# Altium PCB AX309.REV.1.0.PcbDoc (part 7 of 10)
Units mil, origin at the board's own origin, x right, y up, seen from the top; angles counter-clockwise.
Board outline 5185 x 3614 mil, 4 copper layers (Top Layer, GND, Mid-Layer 1, Bottom Layer); 191 components, 352 nets, 1106 pads, 425 vias.
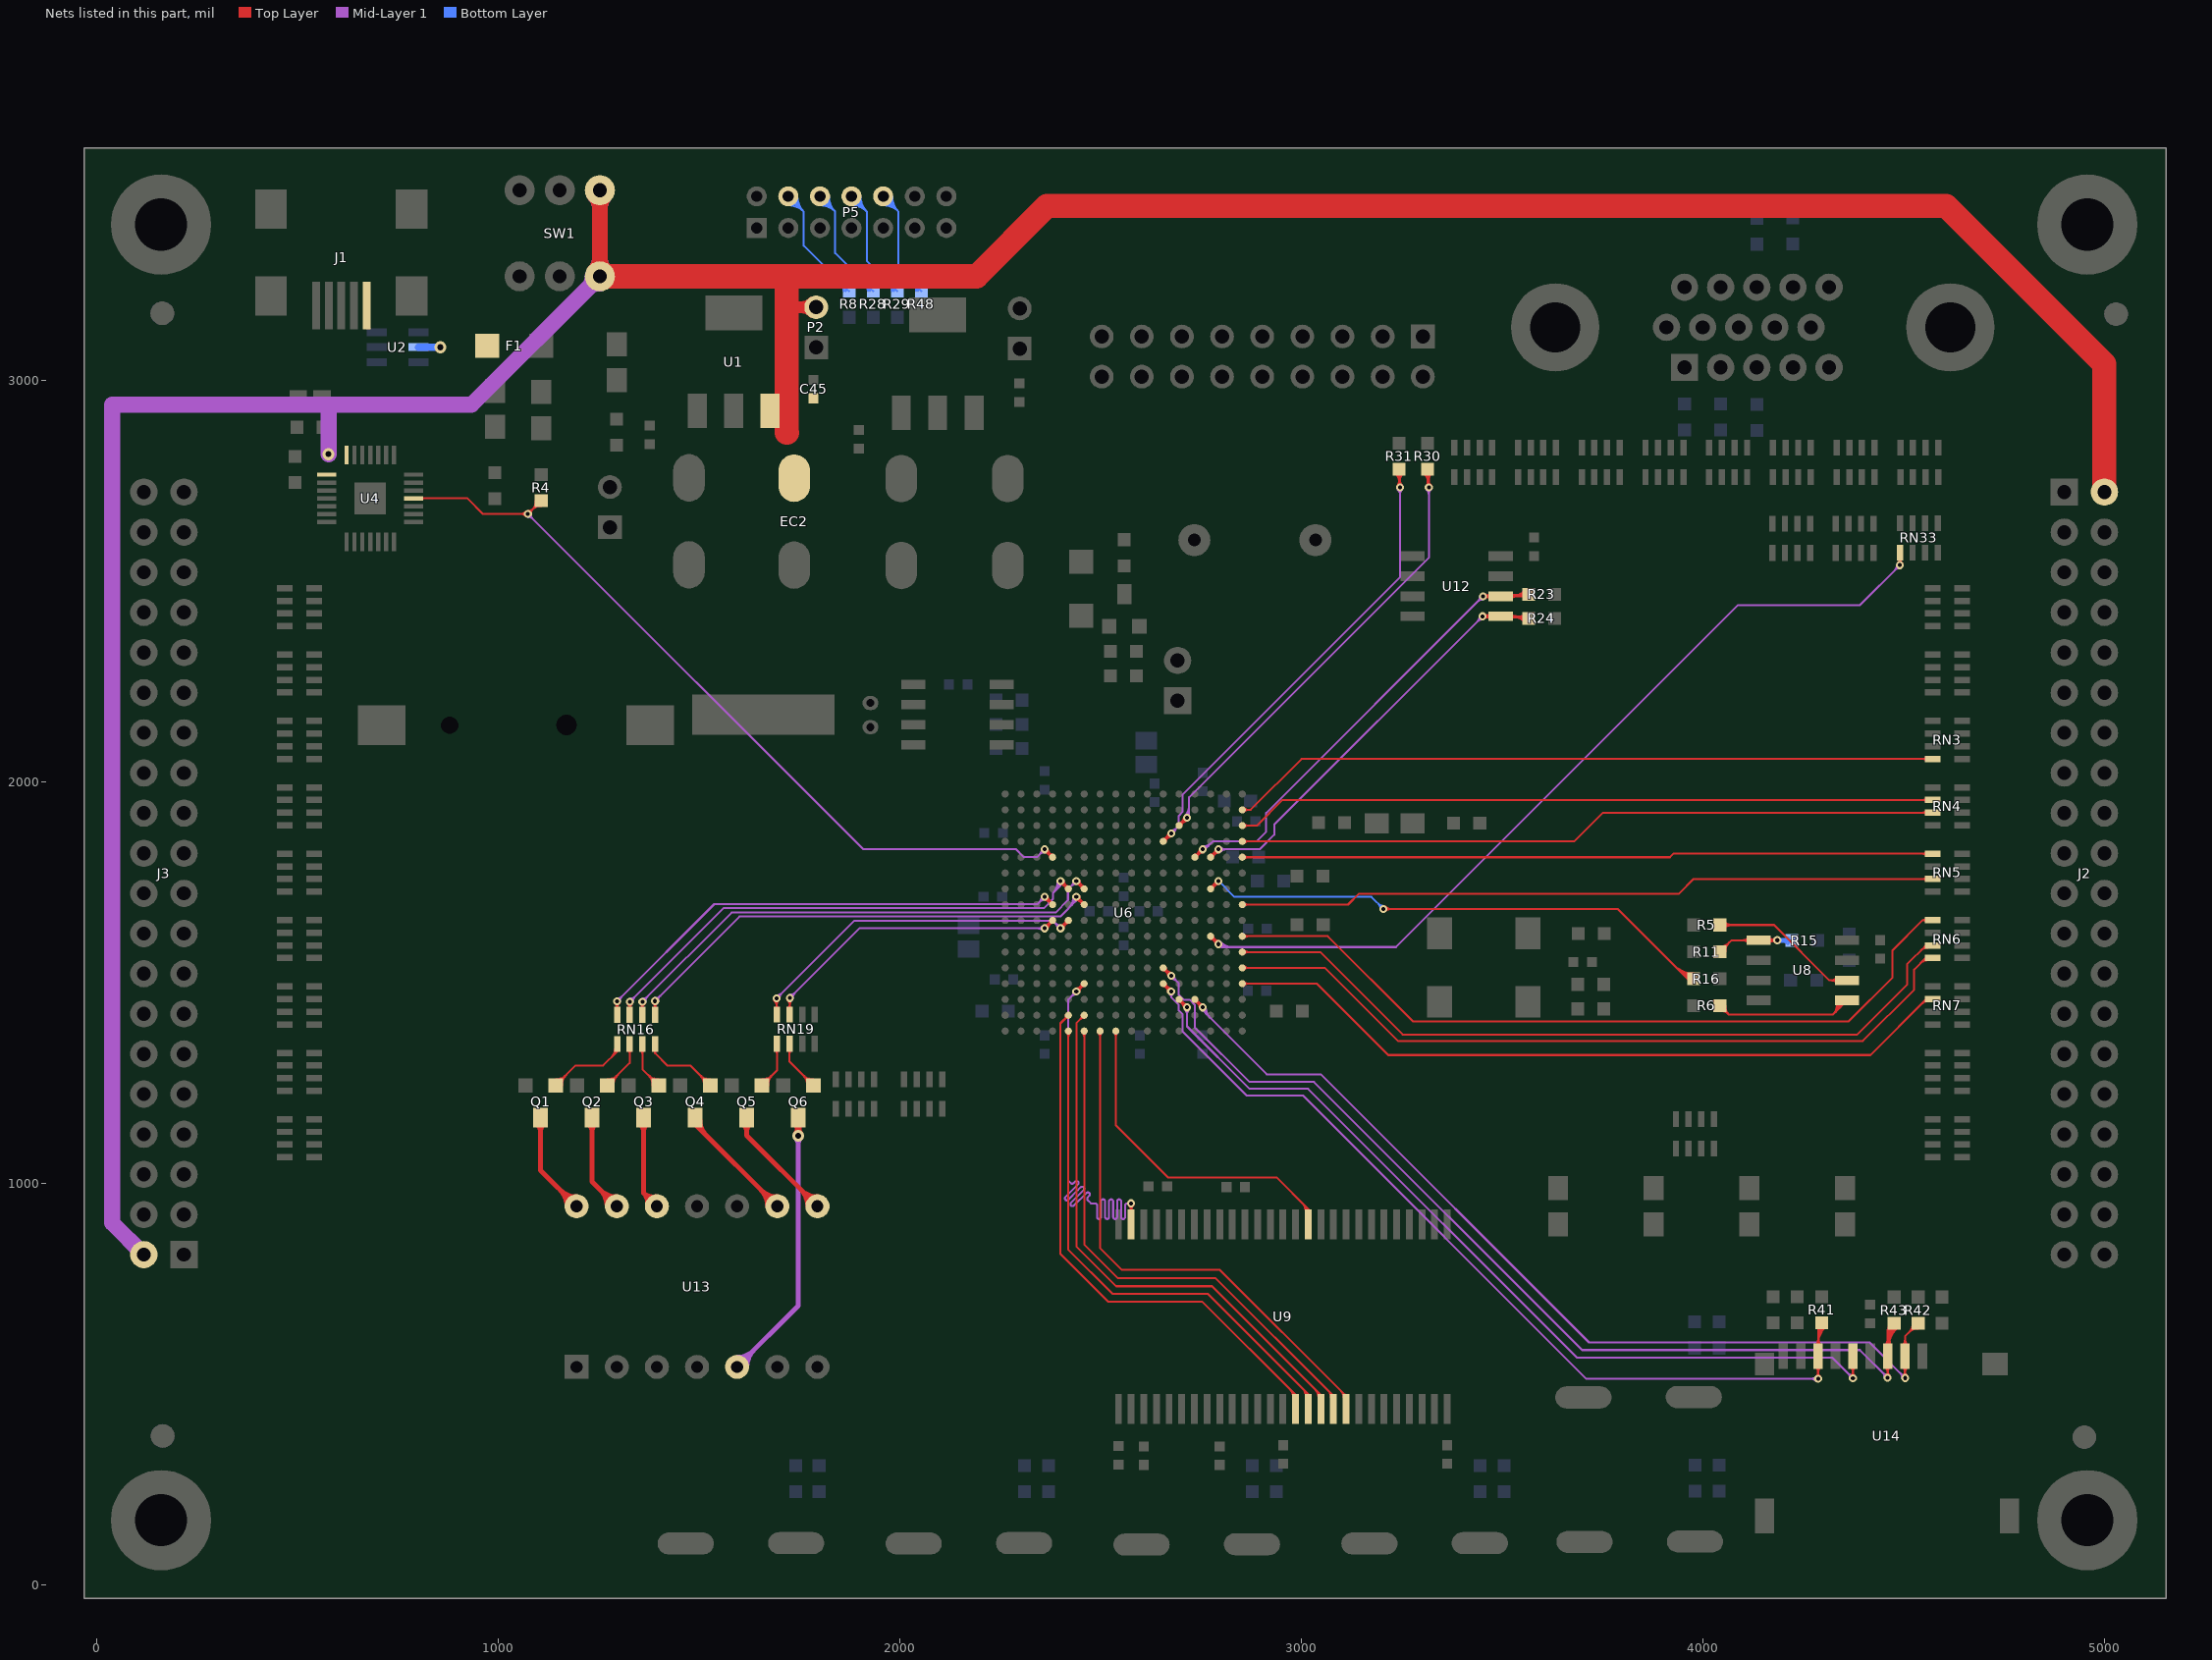
[diagram p9: the nets of this part, all layers, seen from the top]

## Via types
v1: diameter 20, hole 10, Top Layer to Bottom Layer, 328 vias
v2: diameter 30, hole 15, Top Layer to Bottom Layer, 95 vias
v3: diameter 40, hole 20, Top Layer to Bottom Layer, 2 vias

## Nets (pads, with @x,y where several pads share a name; then routed paths per layer and width w, separated by ;. In a path a pad name is that pad's centre, name@x,y a point inside that pad or via, vN(x,y) a via of type N, cw(c..) or ccw(c..) an arc to the next point about the centre after c; other vN are vias at no path point) (continued)
S_DB15: U6.F4 U9.53 | length 1558.9
  Top Layer w5: v1@2438.88,1484.58 ccw(c2436.17,1504.56) U6.F4@2453.63,1494.48 ; v1@2439.55,1479.63 ccw(c2437.9,1491.79) 2448.53,1485.65 ; v1(2439.89,1477.15) U6.F4@2459.57,1496.83 ; v1@2439.89,1484.65 ccw(c2439.89,1502.76) 2452.69,1489.95 ccw(c2465.5,1477.15) v1@2447.39,1477.15 ; v1@2442.37,1476.81 cw(c2454.53,1475.16) 2448.39,1485.79 ; v1@2447.32,1476.14 cw(c2467.3,1473.43) U6.F4@2457.22,1490.89 ; 2449.65,1487.6 cw(c2443.67,1491.05) v1@2441.86,1484.39 ; 2450.34,1486.91 ccw(c2453.79,1480.93) v1@2447.13,1479.12 ; U6.F4@2453.22,1496.83 cw(c2437.87,1496.83) 2448.72,1485.98 cw(c2459.57,1475.13) U6.F4@2459.57,1490.48 ; v1@2571.19,944.2 cw(c2558.39,931.4) 2576.5,931.4 cw(c2594.6,931.4) v1@2581.8,944.2 ; U9.53@2572.25,930.24 ccw(c2562.01,940.49) 2576.5,940.49 ccw(c2590.98,940.49) U9.53@2580.74,930.24 ; v1@2572.86,942.94 cw(c2568.3,934.71) 2577.39,937.15 cw(c2582.16,938.43) v1@2579.91,942.83 ; v1@2573.08,942.83 cw(c2570.83,938.43) 2575.6,937.15 cw(c2584.69,934.71) v1@2580.13,942.94 ; U9.53@2576.5,897 v1(2576.5,949.5) ; v1@2441.83,1484.39 ccw(c2443.66,1491.22) 2447.19,1485.1 cw(c2443.66,1491.22) v1@2441.83,1484.39 ; v1@2447.13,1479.09 cw(c2453.96,1480.92) 2447.84,1484.45 ccw(c2453.96,1480.92) v1@2447.13,1479.09
  Mid-Layer 1 w5: v1@2432.39,1477.15 cw(c2414.28,1477.15) 2427.09,1464.35 cw(c2439.89,1451.54) v1@2439.89,1469.65 ; v1(2439.89,1477.15) 2420.2,1457.46 2420.2,1005.8 2426,1000 ccw(c2429.54,1003.54) 2433.07,1000 2436.74,1003.67 cw(c2440.28,1000.13) 2443.81,1003.67 cw(c2440.28,1000.13) 2443.81,996.6 2412.67,965.46 ccw(c2416.21,961.92) 2412.67,958.39 ccw(c2416.21,961.92) 2419.74,958.39 2443.68,982.32 2450.88,989.53 cw(c2454.42,985.99) 2457.95,989.53 cw(c2454.42,985.99) 2457.95,982.46 2450.75,975.25 2426.69,951.19 ccw(c2430.22,947.66) 2426.69,944.12 ccw(c2430.22,947.66) 2433.76,944.12 2465.03,975.39 cw(c2468.56,971.85) 2472.1,975.39 cw(c2468.56,971.85) 2472.1,968.32 2468.43,964.64 ccw(c2471.96,961.11) 2468.43,957.57 2476.5,949.5 2486.5,949.5 cw(c2486.5,944.5) 2491.5,944.5 2491.5,915.48 ccw(c2496.5,915.48) 2496.5,910.48 ccw(c2496.5,915.48) 2501.5,915.48 2501.5,954.53 cw(c2506.5,954.53) 2506.5,959.53 cw(c2506.5,954.53) 2511.5,954.53 2511.5,915.48 ccw(c2516.5,915.48) 2516.5,910.48 ccw(c2516.5,915.48) 2521.5,915.48 2521.5,954.53 cw(c2526.5,954.53) 2526.5,959.53 cw(c2526.5,954.53) 2531.5,954.53 2531.5,915.48 ccw(c2536.5,915.48) 2536.5,910.48 ccw(c2536.5,915.48) 2541.5,915.48 2541.5,954.53 cw(c2546.5,954.53) 2546.5,959.53 cw(c2546.5,954.53) 2551.5,954.53 2551.5,915.48 ccw(c2556.5,915.48) 2556.5,910.48 ccw(c2556.5,915.48) 2561.5,915.48 2561.5,944.5 cw(c2566.5,944.5) 2566.5,949.5 v1(2576.5,949.5)
S_DQM0: U6.E2 U9.15 | length 1429.6
  Top Layer w5: U6.E2@2413.85,1418.09 cw(c2398.5,1418.09) 2409.35,1407.24 cw(c2420.2,1396.39) U6.E2@2420.2,1411.74 ; U6.E2@2420.2,1418.09 2400,1397.89 2400,824 2520,704 2754,704 2985.94,472.06 U9.15@2985.94,437 ; 2971.42,486.58 cw(c2950.84,466) U9.15@2979.94,466 ; 2979.96,478.04 cw(c2967.91,466) U9.15@2984.94,466
S_DQM1: U6.H1 U9.39 | length 933.5
  Top Layer w5: U6.H1@2533.82,1374.23 cw(c2522.96,1363.37) 2538.32,1363.37 cw(c2553.67,1363.37) U6.H1@2542.81,1374.23 ; U6.H1@2538.32,1378.72 2538.32,1143.68 2668,1014 2939,1014 3017.44,935.56 ; 3000.44,952.56 cw(c2973.88,926) U9.39@3011.44,926 ; 3008.97,944.03 cw(c2990.95,926) U9.39@3016.44,926 ; U9.39@3014.83,931.4 ccw(c3012.83,935.56) 3017.44,935.56 ; U9.39@3017.44,897 3017.44,935.56 ; 3017.51,935.49 cw(c3008.02,926) U9.39@3021.44,926 ; U9.39@3020.05,931.4 cw(c3022.06,935.56) 3017.44,935.56
S_NCAS: U6.F2 U9.17 | length 1441.8
  Top Layer w5: U6.F2@2453.22,1418.09 cw(c2437.87,1418.09) 2448.72,1407.24 cw(c2459.57,1396.39) U6.F2@2459.57,1411.74 ; U6.F2@2459.57,1418.09 2440,1398.52 2440,842 2539,743 2778,743 3048.94,472.06 U9.17@3048.94,437 ; 3034.41,486.59 cw(c3013.81,466) U9.17@3042.94,466 ; 3042.94,478.06 cw(c3030.89,466) U9.17@3047.94,466
S_NCS: U6.G1 U9.19 | length 1385.4
  Top Layer w5: U6.G1@2494.45,1374.23 cw(c2483.59,1363.37) 2498.94,1363.37 cw(c2514.3,1363.37) U6.G1@2503.44,1374.23 ; U6.G1@2498.94,1378.72 2498.94,838.06 2553.5,783.5 2797.5,783.5 U9.19@3111,470 ; 3099.52,481.49 cw(c3084.03,466) U9.19@3105.93,466 ; U9.19@3106.93,474.07 ccw(c3111.93,479.07) U9.19@3111.93,472 ; U9.19@3111,437.93 U9.19@3111,470 ; U9.19@3111.93,469.07 U9.19@3111,470
S_NRAS: U6.F1 U9.18 | length 1394.7
  Top Layer w5: U6.F1@2455.08,1374.23 cw(c2444.22,1363.37) 2459.57,1363.37 cw(c2474.92,1363.37) U6.F1@2464.07,1374.23 ; U6.F1@2459.57,1378.72 2459.57,847.43 2544,763 2787,763 3079,471 U9.18@3079,438.43 ; 3067.67,482.33 cw(c3051.34,466) U9.18@3074.43,466 ; U9.18@3076.2,473.8 cw(c3068.41,466) U9.18@3079.43,466 ; U9.18@3076.28,473.72 ccw(c3080.43,477.87) U9.18@3080.43,472
S_NWE: U6.E1 U9.16 | length 1406
  Top Layer w5: U6.E1@2415.71,1374.23 cw(c2404.85,1363.37) 2420.2,1363.37 cw(c2435.55,1363.37) U6.E1@2424.7,1374.23 ; U6.E1@2420.2,1378.72 2420.2,833.8 2530,724 2768,724 3017.44,474.56 ; 3001.15,490.85 cw(c2976.29,466) U9.16@3011.44,466 ; 3009.68,482.32 cw(c2993.36,466) U9.16@3016.44,466 ; U9.16@3015.39,471.64 ccw(c3014.34,474.56) 3017.44,474.56 ; U9.16@3017.44,437 3017.44,474.56 ; U9.16@3019.49,471.64 cw(c3020.55,474.56) 3017.44,474.56
SCL: R23.2 U6.N12 U12.6 | length 1627.9
  Top Layer w5: U6.N12@2735.17,1811.8 v1(2754.85,1831.48) ; U6.N12@2735.17,1818.15 ccw(c2735.17,1833.5) 2746.02,1822.65 ccw(c2756.87,1811.8) U6.N12@2741.52,1811.8 ; U6.N12@2737.52,1817.74 ccw(c2727.44,1835.2) v1@2747.42,1832.49 ; U6.N12@2741.11,1814.15 cw(c2758.57,1804.07) v1@2755.86,1824.05 ; 2744.4,1821.72 ccw(c2740.95,1827.7) v1@2747.61,1829.51 ; 2745.09,1821.03 cw(c2751.07,1817.58) v1@2752.88,1824.24 ; 2746.21,1822.98 cw(c2756.84,1816.84) v1@2755.19,1829 ; 2746.35,1822.84 ccw(c2740.21,1833.47) v1@2752.37,1831.82 ; v1@2747.35,1831.48 cw(c2729.24,1831.48) 2742.05,1818.68 cw(c2754.85,1805.87) v1@2754.85,1823.98 ; v1(3453,2462) U12.6@3497,2462 R23.2@3567,2462 ; v1@3458.3,2456.7 cw(c3471.11,2443.89) 3471.11,2462 cw(c3471.11,2480.11) v1@3458.3,2467.3 ; v1@3458.6,2457.01 cw(c3464.25,2451.97) 3466.2,2459.28 cw(c3468.63,2468.32) v1@3459.95,2464.81 ; v1@3458.6,2466.99 ccw(c3464.25,2472.03) 3466.2,2464.72 ccw(c3468.63,2455.68) v1@3459.95,2459.19 ; U12.6@3472.28,2455.28 ccw(c3456.06,2439.07) 3456.06,2462 ccw(c3456.06,2484.93) U12.6@3472.28,2468.72 ; U12.6@3517.82,2465.51 ccw(c3525.37,2474.93) 3527.76,2463.1 ; U12.6@3520.94,2469.41 ccw(c3534.08,2485.79) 3538.23,2465.21 ; U12.6@3521.72,2455.28 cw(c3537.94,2439.07) 3537.94,2462 cw(c3537.94,2484.93) U12.6@3521.72,2468.72 ; U12.6@3522.34,2462 ccw(c3522.34,2511.66) R23.2@3557.45,2476.55 ; U12.6@3522.91,2456.75 cw(c3537.89,2446.8) 3534.33,2464.42 ; 3534.41,2462 ccw(c3534.41,2499.59) R23.2@3560.99,2473.01 ; R23.2@3557.45,2457.45 ccw(c3546.48,2446.48) 3546.48,2462 ccw(c3546.48,2487.52) R23.2@3564.53,2469.47 ; v1@2752.91,1824.24 ccw(c2751.08,1817.41) 2747.55,1823.53 cw(c2751.08,1817.41) v1@2752.91,1824.24 ; 2746.9,1824.18 ccw(c2740.78,1827.71) 2747.61,1829.54 cw(c2740.78,1827.71) 2746.9,1824.18
  Mid-Layer 1 w5: v1(2754.85,1831.48) 2760.48,1831.48 2781,1852 2890,1852 2913,1875 2913,1922 v1(3453,2462) ; v1@2754.85,1833.98 ccw(c2754.85,1853.61) 2768.73,1839.73 ; v1@2754.85,1838.98 ccw(c2754.85,1870.68) 2777.27,1848.27 ; v1@3445.5,2462 cw(c3427.39,2462) 3440.2,2449.2 cw(c3453,2436.39) v1@3453,2454.5
SD_CLK: U6.M3 U14.5 | length 2425.1
  Top Layer w5: U6.M3@2695.8,1451.11 cw(c2695.8,1435.76) 2706.65,1446.61 cw(c2717.5,1457.46) U6.M3@2702.15,1457.46 ; U6.M3@2695.8,1457.46 v1(2715.48,1437.78) ; U6.M3@2698.15,1451.52 cw(c2688.07,1434.06) v1@2708.05,1436.77 ; U6.M3@2701.74,1455.11 ccw(c2719.2,1465.19) v1@2716.49,1445.21 ; 2705.03,1447.54 cw(c2701.58,1441.56) v1@2708.24,1439.75 ; 2705.72,1448.23 ccw(c2711.7,1451.68) v1@2713.51,1445.02 ; 2706.84,1446.28 ccw(c2717.47,1452.42) v1@2715.82,1440.26 ; 2706.98,1446.42 cw(c2700.84,1435.79) v1@2713,1437.44 ; v1@2707.98,1437.78 ccw(c2689.87,1437.78) 2702.68,1450.58 ccw(c2715.48,1463.39) v1@2715.48,1445.28 ; U14.5@4367.77,542.55 cw(c4351.88,526.66) 4374.35,526.66 cw(c4396.83,526.66) U14.5@4380.94,542.55 ; v1@4369.05,518.95 ccw(c4356.25,531.75) 4374.35,531.75 ccw(c4392.46,531.75) v1@4379.66,518.95 ; v1(4374.35,513.65) U14.5@4374.35,568.82 ; 2707.53,1445.08 cw(c2701.41,1441.55) 2708.24,1439.72 ccw(c2701.41,1441.55) 2707.53,1445.08 ; 2708.18,1445.73 ccw(c2711.71,1451.85) 2713.54,1445.02 cw(c2711.71,1451.85) 2708.18,1445.73
  Mid-Layer 1 w5: v1@2710.18,1432.48 cw(c2697.37,1419.67) 2715.48,1419.67 cw(c2733.59,1419.67) v1@2720.78,1432.48 ; v1(2715.48,1437.78) 2715.48,1390.52 2871,1235 3017,1235 3687,565 4323,565 v1(4374.35,513.65) ; v1@4366.85,513.65 ccw(c4348.75,513.65) 4361.55,526.45 ccw(c4374.35,539.25) v1@4374.35,521.15
SD_DIN: R43.2 U6.L5 U14.3 | length 3086.1
  Top Layer w5: U6.L5@2656.43,1529.85 cw(c2656.43,1514.5) 2667.28,1525.35 cw(c2678.13,1536.2) U6.L5@2662.78,1536.2 ; U6.L5@2656.43,1536.2 v1(2676.11,1516.52) ; U6.L5@2658.78,1530.26 cw(c2648.7,1512.8) v1@2668.68,1515.51 ; U6.L5@2662.37,1533.85 ccw(c2679.83,1543.93) v1@2677.12,1523.95 ; 2665.66,1526.28 cw(c2662.21,1520.3) v1@2668.87,1518.49 ; 2666.35,1526.97 ccw(c2672.33,1530.42) v1@2674.14,1523.76 ; 2667.47,1525.02 ccw(c2678.1,1531.16) v1@2676.45,1519 ; 2667.61,1525.16 cw(c2661.47,1514.53) v1@2673.63,1516.18 ; v1@2668.61,1516.52 ccw(c2650.5,1516.52) 2663.31,1529.32 ccw(c2676.11,1542.13) v1@2676.11,1524.02 ; U14.3@4454.39,542.55 cw(c4438.49,526.66) 4460.97,526.66 cw(c4483.45,526.66) U14.3@4467.55,542.55 ; U14.3@4454.39,595.09 ccw(c4438.49,610.98) 4460.97,610.98 ccw(c4483.45,610.98) U14.3@4467.55,595.09 ; U14.3@4455.5,596.04 ccw(c4443.31,612.81) 4463.79,609.56 ; v1@4455.67,520.27 ccw(c4442.86,533.08) 4460.97,533.08 ccw(c4479.08,533.08) v1@4466.27,520.27 ; U14.3@4455.87,596.3 ccw(c4440.2,620.26) 4468.22,614.39 ; U14.3@4458.61,592.11 ccw(c4449.55,605.97) 4465.75,602.58 ; v1(4460.97,514.97) U14.3@4460.97,568.82 4460.97,634.97 ; U14.3@4460.97,579.71 cw(c4548.29,579.71) R43.2@4486.55,641.45 ; U14.3@4460.97,591.78 cw(c4536.22,591.78) R43.2@4483.01,644.99 ; 4460.97,603.85 cw(c4524.15,603.85) R43.2@4479.47,648.53 ; 4460.97,615.92 cw(c4512.08,615.92) R43.2@4475.94,652.06 ; 4460.97,627.99 cw(c4500.01,627.99) R43.2@4472.4,655.6 ; R43.2@4464.06,647.16 cw(c4452.28,643.66) 4460.97,634.97 ; 4464.17,612.01 ccw(c4488.1,608.22) U14.3@4468.5,593.98 ; 4466.44,605.88 ccw(c4482.43,602.54) U14.3@4468.76,593.6 ; R43.2@4473.16,638.06 ccw(c4469.66,626.28) 4460.97,634.97 ; R43.2@4477,651 4460.97,634.97 ; v1@2674.17,1523.76 cw(c2672.34,1530.59) 2668.81,1524.47 ccw(c2672.34,1530.59) v1@2674.17,1523.76 ; 2668.16,1523.82 cw(c2662.04,1520.29) 2668.87,1518.46 ccw(c2662.04,1520.29) 2668.16,1523.82
  Mid-Layer 1 w5: v1@2676.11,1509.02 cw(c2676.11,1490.91) 2688.91,1503.72 cw(c2701.72,1516.52) v1@2683.61,1516.52 ; v1(2676.11,1516.52) 2695,1497.63 2695,1469 2707,1457 2722.17,1457 2735.17,1444 2735.17,1387.83 2871,1252 3032,1252 3700,584 4391.94,584 v1(4460.97,514.97) ; v1@4453.47,514.97 ccw(c4435.36,514.97) 4448.17,527.77 ccw(c4460.97,540.58) v1@4460.97,522.47
SD_DOUT: R41.2 U6.L4 U14.7 | length 2709
  Top Layer w5: U6.L4@2656.43,1490.48 cw(c2656.43,1475.13) 2667.28,1485.98 cw(c2678.13,1496.83) U6.L4@2662.78,1496.83 ; U6.L4@2656.43,1496.83 v1(2676,1477.26) ; U6.L4@2658.8,1490.87 cw(c2648.87,1473.67) v1@2668.56,1476.28 ; U6.L4@2662.39,1494.46 ccw(c2679.59,1504.39) v1@2676.98,1484.69 ; 2665.68,1486.9 cw(c2662.34,1481.1) v1@2668.78,1479.29 ; 2666.36,1487.58 ccw(c2672.16,1490.92) v1@2673.97,1484.48 ; 2667.46,1485.67 ccw(c2677.91,1491.7) v1@2676.33,1479.74 ; 2667.59,1485.8 cw(c2661.56,1475.35) v1@2673.52,1476.93 ; v1@2668.5,1477.26 ccw(c2650.39,1477.26) 2663.2,1490.06 ccw(c2676,1502.87) v1@2676,1484.76 ; U14.7@4281.16,542.55 cw(c4265.26,526.66) 4287.74,526.66 cw(c4310.22,526.66) U14.7@4294.32,542.55 ; U14.7@4281.16,595.09 ccw(c4265.26,610.98) 4287.74,610.98 ccw(c4310.22,610.98) U14.7@4294.32,595.09 ; U14.7@4282.16,595.96 ccw(c4271.17,610.63) 4289.32,608.02 ; v1@4282.44,517.56 ccw(c4269.63,530.37) 4287.74,530.37 ccw(c4305.85,530.37) v1@4293.04,517.56 ; v1(4287.74,512.26) U14.7@4287.74,568.82 4287.74,642.74 R41.2@4297,652 ; U14.7@4287.74,597.05 cw(c4351.95,597.05) R41.2@4306.55,642.45 ; 4287.74,609.12 cw(c4339.88,609.12) R41.2@4303.01,645.99 ; 4287.74,621.19 cw(c4327.81,621.19) R41.2@4299.47,649.53 ; 4287.74,633.27 cw(c4315.73,633.27) R41.2@4295.94,653.06 ; 4288.22,600.41 ccw(c4299.28,598.82) U14.7@4290.95,591.38 ; 4289.75,611.03 ccw(c4309.71,608.16) U14.7@4294.68,594.71 ; 2668.04,1484.67 cw(c2661.79,1481.07) 2668.76,1479.2 ccw(c2661.79,1481.07) 2668.04,1484.67 ; 2668.59,1485.22 ccw(c2672.19,1491.47) 2674.06,1484.5 cw(c2672.19,1491.47) 2668.59,1485.22
  Mid-Layer 1 w5: v1@2671.79,1471.06 cw(c2666.24,1462.89) 2676.11,1462.89 ; v1@2676.11,1477.15 2676.11,1462.89 ; v1@2680.36,1471.16 ccw(c2686.28,1462.89) 2676.11,1462.89 ; v1@4282.44,506.96 ccw(c4269.63,494.15) 4269.63,512.26 ccw(c4269.63,530.37) v1@4282.44,517.56 ; v1(4287.74,512.26) 3710.74,512.26 3005,1218 2864,1218 2705,1377 2705,1420 2695,1430 2695,1444 2676.11,1462.89
SD_NCS: R42.2 U6.N3 U14.2 | length 2725.4
  Top Layer w5: U6.N3@2735.17,1451.11 cw(c2735.17,1435.76) 2746.02,1446.61 cw(c2756.87,1457.46) U6.N3@2741.52,1457.46 ; U6.N3@2735.17,1457.46 v1(2754.85,1437.78) ; U6.N3@2737.52,1451.52 cw(c2727.44,1434.06) v1@2747.42,1436.77 ; U6.N3@2741.11,1455.11 ccw(c2758.57,1465.19) v1@2755.86,1445.21 ; 2744.4,1447.54 cw(c2740.95,1441.56) v1@2747.61,1439.75 ; 2745.09,1448.23 ccw(c2751.07,1451.68) v1@2752.88,1445.02 ; 2746.21,1446.28 ccw(c2756.84,1452.42) v1@2755.19,1440.26 ; 2746.35,1446.42 cw(c2740.21,1435.79) v1@2752.37,1437.44 ; v1@2747.35,1437.78 ccw(c2729.24,1437.78) 2742.05,1450.58 ccw(c2754.85,1463.39) v1@2754.85,1445.28 ; U14.2@4497.69,542.55 cw(c4481.8,526.66) 4504.28,526.66 cw(c4526.75,526.66) U14.2@4510.86,542.55 ; U14.2@4497.69,595.09 ccw(c4481.8,610.98) 4504.28,610.98 ccw(c4526.75,610.98) U14.2@4510.86,595.09 ; v1@4498.97,519.58 ccw(c4486.17,532.38) 4504.28,532.38 ccw(c4522.38,532.38) v1@4509.58,519.58 ; v1(4504.28,514.28) U14.2@4504.28,568.82 4504.28,618.28 R42.2@4537,651 ; R42.2@4523.5,651 cw(c4490.91,651) 4513.95,627.95 cw(c4537,604.91) R42.2@4537,637.5 ; R42.2@4528.5,651 cw(c4507.98,651) 4522.49,636.49 cw(c4537,621.98) R42.2@4537,642.5 ; v1@2752.91,1445.02 cw(c2751.08,1451.85) 2747.55,1445.73 ccw(c2751.08,1451.85) v1@2752.91,1445.02 ; 2746.9,1445.08 cw(c2740.78,1441.55) 2747.61,1439.72 ccw(c2740.78,1441.55) 2746.9,1445.08
  Mid-Layer 1 w5: v1(2754.85,1437.78) 2754.85,1430.15 2914,1271 3049,1271 3717,603 4415.55,603 v1(4504.28,514.28) ; v1@2757.35,1437.78 ccw(c2781.81,1437.78) 2764.51,1420.49 ; v1@2762.35,1437.78 ccw(c2798.88,1437.78) 2773.05,1411.95 ; v1@4496.78,514.28 ccw(c4478.67,514.28) 4491.47,527.08 ccw(c4504.28,539.88) v1@4504.28,521.78
SDA: R24.2 U6.P12 U12.5 | length 1547.9
  Top Layer w5: U6.P12@2774.54,1811.8 v1(2794.22,1831.48) ; U6.P12@2774.54,1818.15 ccw(c2774.54,1833.5) 2785.39,1822.65 ccw(c2796.24,1811.8) U6.P12@2780.89,1811.8 ; U6.P12@2776.89,1817.74 ccw(c2766.81,1835.2) v1@2786.79,1832.49 ; U6.P12@2780.48,1814.15 cw(c2797.94,1804.07) v1@2795.23,1824.05 ; 2783.77,1821.72 ccw(c2780.32,1827.7) v1@2786.98,1829.51 ; 2784.46,1821.03 cw(c2790.44,1817.58) v1@2792.25,1824.24 ; 2785.58,1822.98 cw(c2796.21,1816.84) v1@2794.56,1829 ; 2785.72,1822.84 ccw(c2779.58,1833.47) v1@2791.74,1831.82 ; v1@2786.72,1831.48 cw(c2768.61,1831.48) 2781.42,1818.68 cw(c2794.22,1805.87) v1@2794.22,1823.98 ; v1(3452,2412) U12.5@3497,2412 3562,2412 R24.2@3567,2407 ; v1@3457.3,2406.7 cw(c3470.11,2393.89) 3470.11,2412 cw(c3470.11,2430.11) v1@3457.3,2417.3 ; v1@3457.57,2406.97 cw(c3463.65,2401.48) 3465.77,2409.4 cw(c3468.59,2419.9) v1@3458.77,2415.22 ; v1@3457.57,2417.03 ccw(c3463.65,2422.52) 3465.77,2414.6 ccw(c3468.59,2404.1) v1@3458.77,2408.78 ; U12.5@3472.28,2405.28 ccw(c3456.06,2389.07) 3456.06,2412 ccw(c3456.06,2434.93) U12.5@3472.28,2418.72 ; U12.5@3517.82,2408.49 cw(c3525.37,2399.07) 3527.76,2410.9 ; U12.5@3520.94,2404.59 cw(c3534.08,2388.21) 3538.23,2408.79 ; U12.5@3521.72,2405.28 cw(c3537.94,2389.07) 3537.94,2412 cw(c3537.94,2434.93) U12.5@3521.72,2418.72 ; U12.5@3522.34,2412 cw(c3522.34,2362.34) R24.2@3557.45,2397.45 ; U12.5@3522.91,2417.25 ccw(c3537.89,2427.2) 3534.33,2409.58 ; 3534.41,2412 cw(c3534.41,2374.41) R24.2@3560.99,2400.99 ; R24.2@3557.45,2416.55 cw(c3546.48,2427.52) 3546.48,2412 cw(c3546.48,2386.48) R24.2@3564.53,2404.53 ; 2786.27,1824.18 ccw(c2780.15,1827.71) 2786.98,1829.54 cw(c2780.15,1827.71) 2786.27,1824.18 ; 2786.92,1823.53 cw(c2790.45,1817.41) 2792.28,1824.24 ccw(c2790.45,1817.41) 2786.92,1823.53
  Mid-Layer 1 w5: v1(2794.22,1831.48) 2896.48,1831.48 2933,1868 2933,1893 v1(3452,2412) ; v1@2799.52,1826.18 cw(c2812.33,1813.37) 2812.33,1831.48 cw(c2812.33,1849.59) v1@2799.52,1836.78 ; v1@3444.5,2412 cw(c3426.39,2412) 3439.2,2399.2 cw(c3452,2386.39) v1@3452,2404.5
SEL0: RN19.7 U6.D8 | length 1033
  Top Layer w5: v1@1720.7,1455.7 cw(c1707.89,1442.89) 1726,1442.89 cw(c1744.11,1442.89) v1@1731.3,1455.7 ; RN19.7@1721.7,1435.76 ccw(c1711.31,1446.15) 1726,1446.15 ; RN19.7@1726,1420.65 v1(1726,1461) ; 1726,1443.72 ccw(c1737.25,1443.72) RN19.7@1729.3,1435.76 ; v1@2360.14,1642.06 ccw(c2357.43,1662.04) U6.D8@2374.89,1651.96 ; v1@2360.81,1637.11 ccw(c2359.16,1649.27) 2369.79,1643.13 ; v1(2361.15,1634.63) U6.D8@2380.83,1654.32 ; v1@2361.15,1642.13 ccw(c2361.15,1660.24) 2373.95,1647.43 ccw(c2386.76,1634.63) v1@2368.65,1634.63 ; v1@2363.63,1634.29 cw(c2375.79,1632.64) 2369.65,1643.27 ; v1@2368.39,1636.6 cw(c2375.05,1638.41) 2371.6,1644.39 ; v1@2368.58,1633.62 cw(c2388.56,1630.91) U6.D8@2378.48,1648.37 ; 2370.91,1645.08 cw(c2364.93,1648.53) v1@2363.12,1641.87 ; U6.D8@2374.48,1654.32 cw(c2359.13,1654.32) 2369.98,1643.46 cw(c2380.83,1632.61) U6.D8@2380.83,1647.96 ; v1@2363.09,1641.87 ccw(c2364.92,1648.7) 2368.45,1642.58 cw(c2364.92,1648.7) v1@2363.09,1641.87 ; v1@2368.39,1636.57 cw(c2375.22,1638.4) 2369.1,1641.93 ccw(c2375.22,1638.4) v1@2368.39,1636.57
  Mid-Layer 1 w5: v1(1726,1461) 1899.63,1634.63 v1(2361.15,1634.63) ; v1@1726,1468.5 ccw(c1726,1486.61) 1738.8,1473.8 ccw(c1751.61,1461) v1@1733.5,1461 ; v1@2355.85,1629.33 ccw(c2343.04,1616.52) 2343.04,1634.63 ccw(c2343.04,1652.74) v1@2355.85,1639.93
SEL0_T: Q6.1 RN19.2 | length 247.6
  Top Layer w5: RN19.2@1721.7,1331.39 cw(c1712.52,1322.22) 1725.5,1322.22 cw(c1738.47,1322.22) RN19.2@1729.3,1331.39 ; RN19.2@1725.5,1347 1725.5,1302.5 Q6.1@1785,1243 ; Q6.1@1769.5,1243 ccw(c1732.08,1243) 1758.54,1269.46 ccw(c1785,1295.92) Q6.1@1785,1258.5 ; Q6.1@1774.5,1243 ccw(c1749.15,1243) 1767.08,1260.92 ccw(c1785,1278.85) Q6.1@1785,1253.5
SEL0_TT: Q6.3 U13.5 | length 939.1
  Top Layer w12: Q6.3@1738.51,1147.51 cw(c1718.03,1127.03) 1747,1127.03 cw(c1775.97,1127.03) Q6.3@1755.49,1147.51 ; v2@1742.5,1125.79 ccw(c1735.63,1137.7) 1748.91,1134.14 ; 1744.17,1137.6 cw(c1730.9,1134.05) 1740.63,1124.35 ccw(c1725.27,1139.73) 1747,1139.73 ccw(c1768.73,1139.73) 1753.36,1124.36 cw(c1763.1,1134.05) 1749.83,1137.6 ; 1745.09,1134.14 ccw(c1758.37,1137.7) v2@1751.5,1125.79 ; v2(1747,1118) Q6.3@1747,1163
  Mid-Layer 1 w12: U13.5@1595,542 1747,694 v2(1747,1118) ; U13.5@1595,566 ccw(c1595,623.94) 1635.97,582.97 ccw(c1676.94,542) U13.5@1619,542 ; v2@1740.64,1111.64 cw(c1725.27,1096.27) 1747,1096.27 cw(c1768.73,1096.27) v2@1753.36,1111.64
SEL1: RN19.8 U6.E8 | length 1119.5
  Top Layer w5: v1@1687.7,1454.7 cw(c1674.89,1441.89) 1693,1441.89 cw(c1711.11,1441.89) v1@1698.3,1454.7 ; RN19.8@1690.2,1435.76 ccw(c1683.44,1442.52) 1693,1442.52 ; RN19.8@1693,1421.15 v1(1693,1460) ; 1693,1447.35 ccw(c1709.39,1447.35) RN19.8@1697.8,1435.76 ; v1@2399.51,1642.06 ccw(c2396.8,1662.04) U6.E8@2414.26,1651.96 ; v1@2400.18,1637.11 ccw(c2398.53,1649.27) 2409.16,1643.13 ; v1(2400.52,1634.63) U6.E8@2420.2,1654.32 ; v1@2400.52,1642.13 ccw(c2400.52,1660.24) 2413.32,1647.43 ccw(c2426.13,1634.63) v1@2408.02,1634.63 ; v1@2402.49,1641.87 ccw(c2404.3,1648.53) 2410.28,1645.08 ; v1@2403,1634.29 cw(c2415.16,1632.64) 2409.02,1643.27 ; v1@2407.76,1636.6 cw(c2414.42,1638.41) 2410.97,1644.39 ; v1@2407.95,1633.62 cw(c2427.93,1630.91) U6.E8@2417.85,1648.37 ; U6.E8@2413.85,1654.32 cw(c2398.5,1654.32) 2409.35,1643.46 cw(c2420.2,1632.61) U6.E8@2420.2,1647.96 ; v1@2402.46,1641.87 ccw(c2404.29,1648.7) 2407.82,1642.58 cw(c2404.29,1648.7) v1@2402.46,1641.87 ; v1@2407.76,1636.57 cw(c2414.59,1638.4) 2408.47,1641.93 ccw(c2414.59,1638.4) v1@2407.76,1636.57
  Mid-Layer 1 w5: v1(1693,1460) 1886,1653 2382.15,1653 v1(2400.52,1634.63) ; v1@1693,1467.5 ccw(c1693,1485.61) 1705.8,1472.8 ccw(c1718.61,1460) v1@1700.5,1460 ; v1@2393.02,1634.63 ccw(c2374.91,1634.63) 2387.72,1647.43 ccw(c2400.52,1660.24) v1@2400.52,1642.13
SEL1_T: Q5.1 RN19.1 | length 238.5
  Top Layer w5: Q5.1@1656.6,1243 1694,1280.4 RN19.1@1694,1347 ; Q5.1@1656.6,1253.5 ccw(c1656.6,1278.85) 1674.52,1260.92 ccw(c1692.45,1243) Q5.1@1667.1,1243 ; Q5.1@1656.6,1258.5 ccw(c1656.6,1295.92) 1683.06,1269.46 ccw(c1709.52,1243) Q5.1@1672.1,1243 ; RN19.1@1690.2,1331.39 cw(c1681.03,1322.22) 1694,1322.22 cw(c1706.97,1322.22) RN19.1@1697.8,1331.39
SEL1_TT: Q5.3 U13.8 | length 430.6
  Top Layer w12: Q5.3@1610.11,1147.51 cw(c1589.63,1127.03) 1618.6,1127.03 cw(c1647.57,1127.03) Q5.3@1627.09,1147.51 ; Q5.3@1618.6,1163 1618.6,1118.4 U13.8@1795,942 ; U13.8@1771,942 ccw(c1713.06,942) 1754.03,982.97 ccw(c1795,1023.94) U13.8@1795,966
SEL2: RN16.5 U6.F9 | length 1548.4
  Top Layer w5: v1@1385.18,1448.18 cw(c1372.38,1435.38) 1390.49,1435.38 cw(c1408.59,1435.38) v1@1395.79,1448.18 ; RN16.5@1386.69,1434.76 ccw(c1377.51,1443.93) 1390.49,1443.93 ccw(c1403.46,1443.93) RN16.5@1394.29,1434.76 ; v1@1386.93,1446.89 cw(c1382.87,1439.38) 1391.12,1441.59 cw(c1395.27,1442.7) v1@1393.53,1446.63 ; v1@1387.45,1446.63 cw(c1385.7,1442.7) 1389.86,1441.58 cw(c1398.1,1439.38) v1@1394.05,1446.89 ; RN16.5@1390.49,1419.15 v1(1390.49,1453.49) ; v1@2438.88,1705.94 cw(c2436.17,1685.96) U6.F9@2453.63,1696.04 ; v1@2439.55,1710.89 cw(c2437.9,1698.73) 2448.53,1704.87 ; v1@2439.89,1705.87 cw(c2439.89,1687.76) 2452.69,1700.57 cw(c2465.5,1713.37) v1@2447.39,1713.37 ; v1(2439.89,1713.37) U6.F9@2459.57,1693.68 ; v1@2442.37,1713.71 ccw(c2454.53,1715.36) 2448.39,1704.73 ; v1@2447.13,1711.4 ccw(c2453.79,1709.59) 2450.34,1703.61 ; v1@2447.32,1714.38 ccw(c2467.3,1717.09) U6.F9@2457.22,1699.63 ; 2449.65,1702.92 ccw(c2443.67,1699.47) v1@2441.86,1706.13 ; U6.F9@2453.22,1693.68 ccw(c2437.87,1693.68) 2448.72,1704.54 ccw(c2459.57,1715.39) U6.F9@2459.57,1700.04 ; v1@2441.83,1706.13 cw(c2443.66,1699.3) 2447.19,1705.42 ccw(c2443.66,1699.3) v1@2441.83,1706.13 ; v1@2447.13,1711.43 ccw(c2453.96,1709.6) 2447.84,1706.07 cw(c2453.96,1709.6) v1@2447.13,1711.43
  Mid-Layer 1 w5: v1(1390.49,1453.49) 1601,1664 2400,1664 2439.89,1703.89 v1(2439.89,1713.37) ; v1@1390.49,1460.99 ccw(c1390.49,1479.09) 1403.29,1466.29 ccw(c1416.09,1453.49) v1@1397.99,1453.49 ; 2420.38,1684.38 ccw(c2391.39,1713.37) v1@2432.39,1713.37 ; 2428.92,1692.92 ccw(c2408.46,1713.37) v1@2437.39,1713.37 ; 2437.45,1701.45 ccw(c2425.53,1713.37) v1@2442.39,1713.37
SEL2_T: Q4.1 RN16.4 | length 306.9
  Top Layer w5: RN16.4@1387.29,1329.87 cw(c1382.57,1323.51) 1390.49,1323.51 ; RN16.4@1390.49,1346 1390.49,1323.51 ; RN16.4@1393.69,1329.87 ccw(c1398.41,1323.51) 1390.49,1323.51 ; Q4.1@1512.7,1243 ccw(c1475.28,1243) 1501.74,1269.46 ccw(c1528.2,1295.92) Q4.1@1528.2,1258.5 ; Q4.1@1517.7,1243 ccw(c1492.35,1243) 1510.28,1260.92 ccw(c1528.2,1278.85) Q4.1@1528.2,1253.5 ; Q4.1@1528.2,1243 1478.6,1292.6 1421.4,1292.6 1390.49,1323.51
SEL2_TT: Q4.3 U13.9 | length 437
  Top Layer w12: Q4.3@1490.2,1163 1490.2,1146.8 U13.9@1695,942 ; Q4.3@1502.2,1156 ccw(c1553.38,1156) 1517.19,1119.81 ; U13.9@1671,942 ccw(c1613.06,942) 1654.03,982.97 ccw(c1695,1023.94) U13.9@1695,966
SEL3: RN16.6 U6.F10 | length 1561.1
  Top Layer w5: v1@1353.69,1446.69 cw(c1340.89,1433.89) 1358.99,1433.89 cw(c1377.1,1433.89) v1@1364.3,1446.69 ; RN16.6@1355.19,1434.76 ccw(c1346.02,1443.93) 1358.99,1443.93 ccw(c1371.97,1443.93) RN16.6@1362.79,1434.76 ; RN16.6@1358.99,1419.15 v1(1358.99,1451.99) ; v1@1361.81,1445.04 ccw(c1364.13,1439.35) 1358.19,1440.94 ccw(c1354.83,1441.84) 1356.15,1445.05 cw(c1353.85,1439.35) 1359.8,1440.94 cw(c1363.15,1441.84) v1@1361.83,1445.05 ; v1@2438.88,1745.31 cw(c2436.17,1725.33) U6.F10@2453.63,1735.41 ; v1@2439.55,1750.26 cw(c2437.9,1738.1) 2448.53,1744.24 ; v1@2439.89,1745.24 cw(c2439.89,1727.13) 2452.69,1739.94 cw(c2465.5,1752.74) v1@2447.39,1752.74 ; v1(2439.89,1752.74) U6.F10@2459.57,1733.06 ; v1@2442.37,1753.08 ccw(c2454.53,1754.73) 2448.39,1744.1 ; v1@2447.13,1750.77 ccw(c2453.79,1748.96) 2450.34,1742.98 ; v1@2447.32,1753.75 ccw(c2467.3,1756.46) U6.F10@2457.22,1739 ; 2449.65,1742.29 ccw(c2443.67,1738.84) v1@2441.86,1745.5 ; U6.F10@2453.22,1733.06 ccw(c2437.87,1733.06) 2448.72,1743.91 ccw(c2459.57,1754.76) U6.F10@2459.57,1739.41 ; v1@2441.83,1745.5 cw(c2443.66,1738.67) 2447.19,1744.79 ccw(c2443.66,1738.67) v1@2441.83,1745.5 ; v1@2447.13,1750.8 ccw(c2453.96,1748.97) 2447.84,1745.44 cw(c2453.96,1748.97) v1@2447.13,1750.8
  Mid-Layer 1 w5: v1(1358.99,1451.99) 1581,1674 2388,1674 2419,1705 2419,1731.85 v1(2439.89,1752.74) ; v1@1358.99,1459.49 ccw(c1358.99,1477.6) 1371.8,1464.8 ccw(c1384.6,1451.99) v1@1366.49,1451.99 ; v1@2432.39,1752.74 cw(c2414.28,1752.74) 2427.09,1739.94 cw(c2439.89,1727.13) v1@2439.89,1745.24
SEL3_T: Q3.1 RN16.3 | length 238.9
  Top Layer w5: RN16.3@1355.19,1330.39 cw(c1346.02,1321.22) 1358.99,1321.22 cw(c1371.97,1321.22) RN16.3@1362.79,1330.39 ; RN16.3@1358.99,1346 1358.99,1283.81 Q3.1@1399.8,1243 ; Q3.1@1384.3,1243 ccw(c1346.88,1243) 1373.34,1269.46 ccw(c1399.8,1295.92) Q3.1@1399.8,1258.5 ; Q3.1@1389.3,1243 ccw(c1363.95,1243) 1381.88,1260.92 ccw(c1399.8,1278.85) Q3.1@1399.8,1253.5
SEL3_TT: Q3.3 U13.12 | length 344.4
  Top Layer w12: Q3.3@1353.31,1147.51 cw(c1332.83,1127.03) 1361.8,1127.03 cw(c1390.77,1127.03) Q3.3@1370.29,1147.51 ; Q3.3@1361.8,1163 1361.8,975.2 ; U13.12@1371.31,945.82 ccw(c1337.82,951.21) 1361.8,975.2 ; U13.12@1391.18,965.69 cw(c1385.79,999.18) 1361.8,975.2 ; U13.12@1395,942 1361.8,975.2
SEL4: RN16.7 U6.E10 | length 1606
  Top Layer w5: v1@1322.19,1446.2 cw(c1309.39,1433.4) 1327.5,1433.4 cw(c1345.6,1433.4) v1@1332.8,1446.2 ; RN16.7@1323.7,1434.76 ccw(c1314.52,1443.93) 1327.5,1443.93 ccw(c1340.47,1443.93) RN16.7@1331.3,1434.76 ; v1@1324.72,1444.54 cw(c1323.54,1441.56) 1326.64,1440.73 cw(c1331.92,1439.31) v1@1330.06,1444.45 ; v1@1324.94,1444.45 cw(c1323.07,1439.31) 1328.36,1440.73 cw(c1331.45,1441.56) v1@1330.27,1444.54 ; RN16.7@1327.5,1419.15 v1(1327.5,1451.5) ; v1@2399.51,1745.31 cw(c2396.8,1725.33) U6.E10@2414.26,1735.41 ; v1@2400.18,1750.26 cw(c2398.53,1738.1) 2409.16,1744.24 ; v1@2400.52,1745.24 cw(c2400.52,1727.13) 2413.32,1739.94 cw(c2426.13,1752.74) v1@2408.02,1752.74 ; v1(2400.52,1752.74) U6.E10@2420.2,1733.06 ; v1@2402.49,1745.5 cw(c2404.3,1738.84) 2410.28,1742.29 ; v1@2403,1753.08 ccw(c2415.16,1754.73) 2409.02,1744.1 ; v1@2407.76,1750.77 ccw(c2414.42,1748.96) 2410.97,1742.98 ; v1@2407.95,1753.75 ccw(c2427.93,1756.46) U6.E10@2417.85,1739 ; U6.E10@2413.85,1733.06 ccw(c2398.5,1733.06) 2409.35,1743.91 ccw(c2420.2,1754.76) U6.E10@2420.2,1739.41 ; v1@2402.46,1745.5 cw(c2404.29,1738.67) 2407.82,1744.79 ccw(c2404.29,1738.67) v1@2402.46,1745.5 ; v1@2407.76,1750.8 ccw(c2414.59,1748.97) 2408.47,1745.44 cw(c2414.59,1748.97) v1@2407.76,1750.8
  Mid-Layer 1 w5: v1(1327.5,1451.5) 1560.99,1685 2359,1685 2381.78,1707.78 2381.78,1722.78 ; v1@1327.5,1459 ccw(c1327.5,1477.11) 1340.3,1464.31 ccw(c1353.1,1451.5) v1@1335,1451.5 ; 2389.67,1730.67 ccw(c2369.38,1750.95) v1@2398.02,1752.6 ; v1@2393.03,1752.31 cw(c2354.46,1750.1) 2381.78,1722.78 ; 2397.55,1738.55 ccw(c2384.3,1751.81) v1@2403.01,1752.88 ; v1@2397.65,1745.81 cw(c2395.87,1741.52) 2400.52,1741.52 ; v1(2400.52,1752.74) 2400.52,1741.52 ; v1@2403.39,1745.81 ccw(c2405.16,1741.52) 2400.52,1741.52 ; 2381.78,1722.78 2400.52,1741.52
SEL4_T: Q2.1 RN16.2 | length 245.2
  Top Layer w5: Q2.1@1271.4,1243 1327.5,1299.1 RN16.2@1327.5,1346 ; Q2.1@1271.4,1253.5 ccw(c1271.4,1278.85) 1289.32,1260.92 ccw(c1307.25,1243) Q2.1@1281.9,1243 ; Q2.1@1271.4,1258.5 ccw(c1271.4,1295.92) 1297.86,1269.46 ccw(c1324.32,1243) Q2.1@1286.9,1243 ; RN16.2@1323.7,1330.39 cw(c1314.52,1321.22) 1327.5,1321.22 cw(c1340.47,1321.22) RN16.2@1331.3,1330.39
SEL4_TT: Q2.3 U13.13 | length 383
  Top Layer w12: Q2.3@1224.91,1147.51 cw(c1204.43,1127.03) 1233.4,1127.03 cw(c1262.37,1127.03) Q2.3@1241.89,1147.51 ; Q2.3@1233.4,1163 1233.4,1003.6 U13.13@1295,942 ; U13.13@1271,942 ccw(c1213.06,942) 1254.03,982.97 ccw(c1295,1023.94) U13.13@1295,966
SEL5: RN16.8 U6.D9 | length 1517
  Top Layer w5: v1@1290.7,1447.7 cw(c1277.89,1434.89) 1296,1434.89 cw(c1314.11,1434.89) v1@1301.3,1447.7 ; RN16.8@1292.2,1434.76 ccw(c1283.03,1443.93) 1296,1443.93 ccw(c1308.97,1443.93) RN16.8@1299.8,1434.76 ; v1@1292.67,1446.28 cw(c1289.25,1439.38) 1296.69,1441.37 cw(c1300.58,1442.42) v1@1298.98,1446.12 ; v1@1293.02,1446.12 cw(c1291.42,1442.42) 1295.31,1441.37 cw(c1302.75,1439.38) v1@1299.33,1446.28 ; RN16.8@1296,1419.15 v1(1296,1453) ; v1@2360.14,1705.94 cw(c2357.43,1685.96) U6.D9@2374.89,1696.04 ; v1@2360.81,1710.89 cw(c2359.16,1698.73) 2369.79,1704.87 ; v1@2361.15,1705.87 cw(c2361.15,1687.76) 2373.95,1700.57 cw(c2386.76,1713.37) v1@2368.65,1713.37 ; v1(2361.15,1713.37) U6.D9@2380.83,1693.68 ; v1@2363.63,1713.71 ccw(c2375.79,1715.36) 2369.65,1704.73 ; v1@2368.39,1711.4 ccw(c2375.05,1709.59) 2371.6,1703.61 ; v1@2368.58,1714.38 ccw(c2388.56,1717.09) U6.D9@2378.48,1699.63 ; 2370.91,1702.92 ccw(c2364.93,1699.47) v1@2363.12,1706.13 ; U6.D9@2374.48,1693.68 ccw(c2359.13,1693.68) 2369.98,1704.54 ccw(c2380.83,1715.39) U6.D9@2380.83,1700.04 ; v1@2363.09,1706.13 cw(c2364.92,1699.3) 2368.45,1705.42 ccw(c2364.92,1699.3) v1@2363.09,1706.13 ; v1@2368.39,1711.43 ccw(c2375.22,1709.6) 2369.1,1706.07 cw(c2375.22,1709.6) v1@2368.39,1711.43
  Mid-Layer 1 w5: v1(1296,1453) 1538,1695 2342.78,1695 v1(2361.15,1713.37) ; v1@1296,1460.5 ccw(c1296,1478.61) 1308.8,1465.8 ccw(c1321.61,1453) v1@1303.5,1453 ; v1@2353.65,1713.37 cw(c2335.54,1713.37) 2348.35,1700.57 cw(c2361.15,1687.76) v1@2361.15,1705.87
SEL5_T: Q1.1 RN16.1 | length 339.2
  Top Layer w5: Q1.1@1143,1243 1193,1293 1261,1293 1296,1328 RN16.1@1296,1346 ; Q1.1@1143,1253.5 ccw(c1143,1278.85) 1160.92,1260.92 ccw(c1178.85,1243) Q1.1@1153.5,1243 ; Q1.1@1143,1258.5 ccw(c1143,1295.92) 1169.46,1269.46 ccw(c1195.92,1243) Q1.1@1158.5,1243 ; 1282.45,1314.45 ccw(c1262.71,1334.19) RN16.1@1290.63,1334.19 ; 1290.99,1322.99 ccw(c1279.78,1334.19) RN16.1@1295.63,1334.19
SEL5_TT: Q1.3 U13.14 | length 394.8
  Top Layer w12: Q1.3@1096.51,1147.51 cw(c1076.03,1127.03) 1105,1127.03 cw(c1133.97,1127.03) Q1.3@1113.49,1147.51 ; Q1.3@1105,1163 1105,1032 U13.14@1195,942 ; U13.14@1171,942 ccw(c1113.06,942) 1154.03,982.97 ccw(c1195,1023.94) U13.14@1195,966
SPI_CLK: R5.2 U8.6 | length 493.6
  Top Layer w5: R5.2@4043,1643 4178,1643 4316,1505 U8.6@4360,1505 ; R5.2@4049.01,1636.99 cw(c4063.52,1622.48) 4063.52,1643 cw(c4063.52,1663.52) R5.2@4049.01,1649.01 ; R5.2@4052.55,1633.45 cw(c4075.59,1610.41) 4075.59,1643 cw(c4075.59,1675.59) R5.2@4052.55,1652.55 ; U8.6@4335.28,1498.28 ccw(c4319.06,1482.07) 4319.06,1505 ccw(c4319.06,1527.93) U8.6@4335.28,1511.72
SPI_CS_N: R11.2 R15.1 U8.1 | length 578
  Top Layer w5: R11.2@4043,1576 4072,1605 U8.1@4140,1605 v1(4186,1605) ; R11.2@4043,1584.5 ccw(c4043,1605.02) 4057.51,1590.51 ccw(c4072.02,1576) R11.2@4051.5,1576 ; R11.2@4043,1589.5 ccw(c4043,1622.09) 4066.05,1599.05 ccw(c4089.09,1576) R11.2@4056.5,1576 ; U8.1@4115.28,1598.28 ccw(c4099.06,1582.07) 4099.06,1605 ccw(c4099.06,1627.93) U8.1@4115.28,1611.72 ; U8.1@4164.72,1598.28 cw(c4180.94,1582.07) 4180.94,1605 cw(c4180.94,1627.93) U8.1@4164.72,1611.72 ; v1@4179.42,1601.39 ccw(c4168.41,1595.35) 4171.66,1607.48 ccw(c4173.95,1616.01) v1@4180.46,1610.06 ; v1@4179.42,1608.61 cw(c4168.41,1614.65) 4171.66,1602.52 cw(c4173.95,1593.99) v1@4180.46,1599.94 ; v1@4180.7,1599.7 ccw(c4167.89,1586.89) 4167.89,1605 ccw(c4167.89,1623.11) v1@4180.7,1610.3
  Bottom Layer w5: v1(4186,1605) R15.1@4221,1605 ; v1@4186.99,1605 cw(c4186.99,1568.99) R15.1@4212.45,1594.45 ; v1@4189.75,1598.5 cw(c4199.24,1582.06) 4204.16,1600.4 ; v1@4190.6,1610.92 ccw(c4199.95,1622.94) 4203.89,1608.23 ; v1@4191.3,1599.7 cw(c4204.11,1586.89) 4204.11,1605 cw(c4204.11,1623.11) v1@4191.3,1610.3 ; v1@4191.82,1605 ccw(c4191.82,1634.18) R15.1@4212.45,1613.55 ; v1@4192.5,1601.25 cw(c4203.72,1594.77) 4200.37,1607.29 ; v1@4192.5,1608.75 ccw(c4207.42,1617.36) 4202.96,1600.72 ; 4199.06,1605 cw(c4199.06,1581.07) R15.1@4215.99,1597.99 ; 4203.89,1605 ccw(c4203.89,1622.11) R15.1@4215.99,1610.01
SPI_DIN: R6.2 U8.5 | length 562.9
  Top Layer w5: R6.2@4043,1442 4065,1420 ; R6.2@4043.28,1433.5 cw(c4043.9,1415.19) 4056.85,1428.15 cw(c4069.81,1441.1) R6.2@4051.5,1441.72 ; R6.2@4043.45,1428.51 cw(c4044.42,1399.43) 4065,1420 ; R6.2@4056.49,1441.55 ccw(c4085.57,1440.58) 4065,1420 ; 4330.85,1425.85 ccw(c4311.27,1445.42) U8.5@4337.7,1453.66 ; U8.5@4332.93,1452.17 cw(c4302.36,1442.65) 4325,1420 ; 4336.7,1431.7 ccw(c4320.19,1448.2) U8.5@4342.48,1455.15 ; 4342.55,1437.55 ccw(c4329.11,1450.98) U8.5@4347.25,1456.64 ; U8.5@4348.39,1443.39 ccw(c4338.03,1453.76) U8.5@4352.02,1458.12 ; U8.5@4354.24,1449.24 ccw(c4346.94,1456.54) U8.5@4356.8,1459.61 ; U8.5@4360,1455 4325,1420 ; U8.5@4360.09,1455.09 ccw(c4355.86,1459.32) U8.5@4361.57,1461.1 ; 4065,1420 4325,1420
SPI_DOUT: R16.1 U6.P10 | length 1706.4
  Top Layer w5: U6.P10@2774.54,1733.06 v1(2794.22,1752.74) ; U6.P10@2774.54,1739.41 ccw(c2774.54,1754.76) 2785.39,1743.91 ccw(c2796.24,1733.06) U6.P10@2780.89,1733.06 ; U6.P10@2776.89,1739 ccw(c2766.81,1756.46) v1@2786.79,1753.75 ; U6.P10@2780.48,1735.41 cw(c2797.94,1725.33) v1@2795.23,1745.31 ; 2783.77,1742.98 ccw(c2780.32,1748.96) v1@2786.98,1750.77 ; 2784.46,1742.29 cw(c2790.44,1738.84) v1@2792.25,1745.5 ; 2785.58,1744.24 cw(c2796.21,1738.1) v1@2794.56,1750.26 ; 2785.72,1744.1 ccw(c2779.58,1754.73) v1@2791.74,1753.08 ; v1@2786.72,1752.74 cw(c2768.61,1752.74) 2781.42,1739.94 cw(c2794.22,1727.13) v1@2794.22,1745.24 ; v1(3205,1683) 3788,1683 3962,1509 R16.1@3978,1509 ; v1@3210.3,1677.7 cw(c3223.11,1664.89) 3223.11,1683 cw(c3223.11,1701.11) v1@3210.3,1688.3 ; 3927.64,1543.36 ccw(c3978,1593.72) R16.1@3978,1522.5 ; 3936.18,1534.82 ccw(c3978,1576.65) R16.1@3978,1517.5 ; 3944.71,1526.29 ccw(c3978,1559.58) R16.1@3978,1512.5 ; 3953.25,1517.75 ccw(c3978,1542.51) R16.1@3978,1507.5 ; 3961.78,1509.22 ccw(c3978,1525.43) R16.1@3978,1502.5 ; 2786.27,1745.44 ccw(c2780.15,1748.97) 2786.98,1750.8 cw(c2780.15,1748.97) 2786.27,1745.44 ; 2786.92,1744.79 cw(c2790.45,1738.67) 2792.28,1745.5 ccw(c2790.45,1738.67) 2786.92,1744.79
  Bottom Layer w5: v1(2794.22,1752.74) 2833.96,1713 3175,1713 v1(3205,1683) ; v1@3197.5,1683 ccw(c3179.39,1683) 3192.2,1695.8 ccw(c3205,1708.61) v1@3205,1690.5
T4: RN7.2 U6.T4 | length 1901
  Top Layer w5: U6.T4@2853.28,1496.83 3039.17,1496.83 3217,1319 4418,1319 4557.25,1458.25 RN7.2@4573,1458.25 ; U6.T4@2857.77,1492.34 cw(c2868.63,1481.48) 2868.63,1496.83 cw(c2868.63,1512.18) U6.T4@2857.77,1501.33 ; 4545.3,1446.3 cw(c4561.19,1430.41) RN7.2@4561.19,1452.88 ; RN7.2@4553.83,1454.83 cw(c4561.19,1447.48) RN7.2@4561.19,1457.88
T5: RN6.4 U6.T5 | length 1966.1
  Top Layer w5: U6.T5@2853.28,1536.2 3058.8,1536.2 3241,1354 4399,1354 4527,1482 4527,1532 4555.64,1560.64 RN6.4@4573,1560.64 ; U6.T5@2857.77,1531.71 cw(c2868.63,1520.85) 2868.63,1536.2 cw(c2868.63,1551.55) U6.T5@2857.77,1540.7 ; 4542.54,1547.54 cw(c4561.19,1528.88) RN6.4@4561.19,1555.26 ; 4551.07,1556.07 cw(c4561.19,1545.96) RN6.4@4561.19,1560.26
T6: RN6.3 U6.T6 | length 1980.9
  Top Layer w5: U6.T6@2853.28,1575.57 3047.43,1575.57 3253,1370 4385,1370 4509,1494 4509,1545 4556.13,1592.13 RN6.3@4573,1592.13 ; U6.T6@2857.77,1571.08 cw(c2868.63,1560.22) 2868.63,1575.57 cw(c2868.63,1590.92) U6.T6@2857.77,1580.07 ; 4543.38,1579.38 cw(c4561.19,1561.58) RN6.3@4561.19,1586.76 ; 4551.92,1587.92 cw(c4561.19,1578.65) RN6.3@4561.19,1591.76
T7: RN6.1 U6.T7 | length 1996.3
  Top Layer w5: U6.T7@2853.28,1614.94 3066.06,1614.94 3278,1403 4364,1403 4473,1512 4473,1580 4548.12,1655.12 RN6.1@4573,1655.12 ; U6.T7@2857.77,1610.45 cw(c2868.63,1599.59) 2868.63,1614.94 cw(c2868.63,1630.3) U6.T7@2857.77,1619.44 ; RN6.1@4557.39,1651.33 ccw(c4548.22,1642.15) 4548.22,1655.12 ccw(c4548.22,1668.1) RN6.1@4557.39,1658.92
T9: RN5.3 U6.T9 | length 1790.7
  Top Layer w5: U6.T9@2853.28,1693.68 3116.69,1693.68 3144,1721 3941,1721 3977.51,1757.51 RN5.3@4573,1757.51 ; U6.T9@2857.77,1689.19 cw(c2868.63,1678.33) 2868.63,1693.68 cw(c2868.63,1709.04) U6.T9@2857.77,1698.18 ; RN5.3@4557.39,1753.71 ccw(c4548.22,1744.53) 4548.22,1757.51 ccw(c4548.22,1770.48) RN5.3@4557.39,1761.31
T12: RN5.1 U6.T12 | length 1767.8
  Top Layer w5: U6.T12@2853.28,1811.8 3918.3,1811.8 3927,1820.5 RN5.1@4573,1820.5 ; U6.T12@2857.77,1807.3 cw(c2868.63,1796.45) 2868.63,1811.8 cw(c2868.63,1827.15) U6.T12@2857.77,1816.29 ; RN5.1@4557.39,1816.7 ccw(c4548.22,1807.53) 4548.22,1820.5 ccw(c4548.22,1833.47) RN5.1@4557.39,1824.3
T13: RN4.3 U6.T13 | length 1793.9
  Top Layer w5: U6.T13@2853.28,1851.17 3680.17,1851.17 3751.88,1922.88 RN4.3@4573,1922.88 ; U6.T13@2857.77,1846.67 cw(c2868.63,1835.82) 2868.63,1851.17 cw(c2868.63,1866.52) U6.T13@2857.77,1855.66 ; RN4.3@4557.39,1919.08 ccw(c4548.22,1909.91) 4548.22,1922.88 ccw(c4548.22,1935.86) RN4.3@4557.39,1926.68
T14: RN4.2 U6.T14 | length 1790.7
  Top Layer w5: U6.T14@2853.28,1890.54 2889.54,1890.54 2953.38,1954.38 RN4.2@4573,1954.38 ; U6.T14@2857.77,1886.04 cw(c2868.63,1875.19) 2868.63,1890.54 cw(c2868.63,1905.89) U6.T14@2857.77,1895.03 ; RN4.2@4557.39,1950.58 ccw(c4548.22,1941.4) 4548.22,1954.38 ccw(c4548.22,1967.35) RN4.2@4557.39,1958.18
T15: RN3.4 U6.T15 | length 1816.8
  Top Layer w5: U6.T15@2853.28,1929.91 2873.91,1929.91 3000.76,2056.76 RN3.4@4573,2056.76 ; U6.T15@2857.77,1925.41 cw(c2868.63,1914.56) 2868.63,1929.91 cw(c2868.63,1945.26) U6.T15@2857.77,1934.4 ; RN3.4@4557.39,2052.96 ccw(c4548.22,2043.79) 4548.22,2056.76 ccw(c4548.22,2069.74) RN3.4@4557.39,2060.56
TCK: P5.6 R28.1 | length 568.6
  Bottom Layer w5: P5.6@1801.26,3458.37 1839,3420.63 ; P5.6@1801.42,3445.87 cw(c1801.78,3416.96) 1822.23,3437.4 cw(c1842.67,3457.85) P5.6@1813.76,3458.21 ; P5.6@1801.48,3440.87 cw(c1801.99,3400.39) 1830.61,3429.02 cw(c1859.24,3457.64) P5.6@1818.76,3458.15 ; P5.6@1801.54,3435.87 cw(c1802.2,3383.83) 1839,3420.63 ; P5.6@1823.76,3458.09 ccw(c1875.8,3457.43) 1839,3420.63 ; R28.1@1920.5,3222 ccw(c1887.91,3222) 1910.95,3245.05 ccw(c1934,3268.09) R28.1@1934,3235.5 ; R28.1@1925.5,3222 ccw(c1904.98,3222) 1919.49,3236.51 ccw(c1934,3251.02) R28.1@1934,3230.5 ; R28.1@1934,3222 1839,3317 1839,3420.63
TDI: P5.10 R48.1 | length 557.2
  Bottom Layer w5: P5.10@1958.74,3458.37 1997,3420.11 ; P5.10@1958.8,3435.87 cw(c1958.95,3382.07) 1997,3420.11 ; P5.10@1958.79,3440.87 cw(c1958.91,3399.02) 1988.5,3428.61 cw(c2018.09,3458.2) P5.10@1976.24,3458.32 ; P5.10@1958.78,3445.87 cw(c1958.86,3415.98) 1979.99,3437.12 cw(c2001.13,3458.25) P5.10@1971.24,3458.33 ; P5.10@1981.24,3458.31 ccw(c2035.04,3458.16) 1997,3420.11 ; R48.1@2040.5,3222 ccw(c2007.91,3222) 2030.95,3245.05 ccw(c2054,3268.09) R48.1@2054,3235.5 ; R48.1@2045.5,3222 ccw(c2024.98,3222) 2039.49,3236.51 ccw(c2054,3251.02) R48.1@2054,3230.5 ; R48.1@2054,3222 1997,3279 1997,3420.11
TDO: P5.8 R29.1 | length 562.9
  Bottom Layer w5: P5.8@1880,3458.37 1918,3420.37 ; P5.8@1880.1,3445.87 cw(c1880.32,3416.47) 1901.11,3437.26 cw(c1921.9,3458.05) P5.8@1892.5,3458.27 ; P5.8@1880.17,3435.87 cw(c1880.58,3382.95) 1918,3420.37 ; P5.8@1880.13,3440.87 cw(c1880.45,3399.71) 1909.55,3428.82 cw(c1938.66,3457.92) P5.8@1897.5,3458.24 ; P5.8@1902.5,3458.2 ccw(c1955.42,3457.79) 1918,3420.37 ; R29.1@1980.5,3222 ccw(c1947.91,3222) 1970.95,3245.05 ccw(c1994,3268.09) R29.1@1994,3235.5 ; R29.1@1985.5,3222 ccw(c1964.98,3222) 1979.49,3236.51 ccw(c1994,3251.02) R29.1@1994,3230.5 ; R29.1@1994,3222 1918,3298 1918,3420.37
TMS: P5.4 R8.1 | length 581.6
  Bottom Layer w5: P5.4@1722.52,3435.87 cw(c1722.52,3381.55) 1760.93,3419.96 cw(c1799.34,3458.37) P5.4@1745.02,3458.37 ; P5.4@1722.52,3440.87 cw(c1722.52,3398.62) 1752.39,3428.5 cw(c1782.27,3458.37) P5.4@1740.02,3458.37 ; P5.4@1722.52,3445.87 cw(c1722.52,3415.69) 1743.86,3437.03 cw(c1765.2,3458.37) P5.4@1735.02,3458.37 ; P5.4@1722.52,3458.37 1761,3419.89 1761,3335 R8.1@1874,3222 ; R8.1@1860.5,3222 ccw(c1827.91,3222) 1850.95,3245.05 ccw(c1874,3268.09) R8.1@1874,3235.5 ; R8.1@1865.5,3222 ccw(c1844.98,3222) 1859.49,3236.51 ccw(c1874,3251.02) R8.1@1874,3230.5
TXD: R4.1 U4.25 U6.D12 | length 2385.1
  Top Layer w5: U4.25@789.21,2705.73 923.27,2705.73 962,2667 v1(1073.7,2667) R4.1@1107,2700.3 ; U4.25@809.51,2703.74 cw(c814.32,2698.94) 814.32,2705.73 cw(c814.32,2712.53) U4.25@809.51,2707.72 ; v1@1068.4,2661.7 ccw(c1055.59,2648.89) 1055.59,2667 ccw(c1055.59,2685.11) v1@1068.4,2672.3 ; v1@1073.7,2674.5 ccw(c1073.7,2692.61) 1086.5,2679.8 ccw(c1099.31,2667) v1@1081.2,2667 ; R4.1@1093.5,2700.3 cw(c1060.91,2700.3) 1083.95,2677.25 cw(c1107,2654.21) R4.1@1107,2686.8 ; R4.1@1098.5,2700.3 cw(c1077.98,2700.3) 1092.49,2685.79 cw(c1107,2671.28) R4.1@1107,2691.8 ; v1@2360.14,1824.05 cw(c2357.43,1804.07) U6.D12@2374.89,1814.15 ; v1@2360.81,1829 cw(c2359.16,1816.84) 2369.79,1822.98 ; v1@2361.15,1823.98 cw(c2361.15,1805.87) 2373.95,1818.68 cw(c2386.76,1831.48) v1@2368.65,1831.48 ; v1(2361.15,1831.48) U6.D12@2380.83,1811.8 ; v1@2363.63,1831.82 ccw(c2375.79,1833.47) 2369.65,1822.84 ; v1@2368.39,1829.51 ccw(c2375.05,1827.7) 2371.6,1821.72 ; v1@2368.58,1832.49 ccw(c2388.56,1835.2) U6.D12@2378.48,1817.74 ; 2370.91,1821.03 ccw(c2364.93,1817.58) v1@2363.12,1824.24 ; U6.D12@2374.48,1811.8 ccw(c2359.13,1811.8) 2369.98,1822.65 ccw(c2380.83,1833.5) U6.D12@2380.83,1818.15 ; v1@2363.09,1824.24 cw(c2364.92,1817.41) 2368.45,1823.53 ccw(c2364.92,1817.41) v1@2363.09,1824.24 ; v1@2368.39,1829.54 ccw(c2375.22,1827.71) 2369.1,1824.18 cw(c2375.22,1827.71) v1@2368.39,1829.54
  Mid-Layer 1 w5: v1@1073.7,2659.5 cw(c1073.7,2641.39) 1086.5,2654.2 cw(c1099.31,2667) v1@1081.2,2667 ; v1(1073.7,2667) 1908.7,1832 2289,1832 2309,1812 2341.67,1812 v1(2361.15,1831.48) ; v1@2353.65,1831.48 cw(c2335.54,1831.48) 2348.35,1818.68 cw(c2361.15,1805.87) v1@2361.15,1823.98
VBUS: F1.1 J1.1 U2.5 | length 54.6
  Bottom Layer w19: U2.5@801,3082.4 v2(855.6,3082.4)
VCC: C45.1 EC2.1 J2.2 J3.2 P2.2 SW1.3 SW1.6 U1.3 U4.7 U4.8 | length 9207.1
  Top Layer w30: 1722,3182 P2.2@1792,3182 P2.2@1801,3182 ; P2.2@1781.73,3171.73 ccw(c1756.93,3146.93) 1756.93,3182 ccw(c1756.93,3217.07) P2.2@1781.73,3192.27
  Top Layer w40: SW1.3@1240.63,3271.37 ccw(c1210.75,3301.25) 1253,3301.25 ccw(c1295.25,3301.25) SW1.3@1265.37,3271.37 ; SW1.6@1240.63,3461.19 cw(c1210.75,3431.32) 1253,3431.32 cw(c1295.25,3431.32) SW1.6@1265.37,3461.19 ; SW1.3@1253,3259 SW1.6@1253,3473.57
  Top Layer w60: SW1.3@1253,3259 1718,3259 ; 1719,2870 1718,2870 1718,3259 ; J2.2@5001,2721.65 5001,3041 4607,3435 2367,3435 2191,3259 1718,3259
  Mid-Layer 1 w40: J3.2@117,821.65 38,900.65 38,2939 933,2939 SW1.3@1253,3259 SW1.6@1253,3473.57 ; v2(577,2816) 577,2937 ; SW1.3@1235.5,3259 cw(c1193.25,3259) 1223.13,3229.13 cw(c1253,3199.25) SW1.3@1253,3241.5 ; SW1.3@1240.63,3271.37 ccw(c1210.75,3301.25) 1253,3301.25 ccw(c1295.25,3301.25) SW1.3@1265.37,3271.37 ; SW1.6@1240.63,3461.19 cw(c1210.75,3431.32) 1253,3431.32 cw(c1295.25,3431.32) SW1.6@1265.37,3461.19
VGA_HSYNC: R30.2 U6.M14 | length 1503.5
  Top Layer w5: U6.M14@2695.8,1890.54 v1(2715.48,1910.22) ; U6.M14@2695.8,1896.89 ccw(c2695.8,1912.24) 2706.65,1901.39 ccw(c2717.5,1890.54) U6.M14@2702.15,1890.54 ; U6.M14@2698.15,1896.48 ccw(c2688.07,1913.94) v1@2708.05,1911.23 ; U6.M14@2701.74,1892.89 cw(c2719.2,1882.81) v1@2716.49,1902.79 ; 2705.03,1900.46 ccw(c2701.58,1906.44) v1@2708.24,1908.25 ; 2705.72,1899.77 cw(c2711.7,1896.32) v1@2713.51,1902.98 ; 2706.84,1901.72 cw(c2717.47,1895.58) v1@2715.82,1907.74 ; 2706.98,1901.58 ccw(c2700.84,1912.21) v1@2713,1910.56 ; v1@2707.98,1910.22 cw(c2689.87,1910.22) 2702.68,1897.42 cw(c2715.48,1884.61) v1@2715.48,1902.72 ; R30.2@3305.45,2768.45 cw(c3275.17,2738.17) v1@3318,2738.17 ; R30.2@3308.99,2771.99 cw(c3287.24,2750.24) 3318,2750.24 ; v1@3311.61,2736.93 ccw(c3292.71,2748.56) 3314.3,2753.7 ; v1@3312.7,2738.3 ccw(c3299.89,2751.11) 3318,2751.11 ccw(c3336.11,2751.11) v1@3323.3,2738.3 ; 3315.64,2748.08 ccw(c3329.28,2751.33) v1@3321.93,2739.39 ; v1(3318,2733) R30.2@3318,2775 ; 3318,2752.65 cw(c3340.35,2752.65) R30.2@3324.55,2768.45 ; 2707.53,1902.92 ccw(c2701.41,1906.45) 2708.24,1908.28 cw(c2701.41,1906.45) 2707.53,1902.92 ; 2708.18,1902.27 cw(c2711.71,1896.15) 2713.54,1902.98 ccw(c2711.71,1896.15) 2708.18,1902.27
  Mid-Layer 1 w5: v1@2710.18,1915.52 ccw(c2684.05,1941.65) 2721,1941.65 ; v1@2713.71,1911.99 ccw(c2696.12,1929.58) 2721,1929.58 ; v1(2715.48,1910.22) 2721,1915.74 2721,1961 3318,2558 v1(3318,2733) ; v1@3312.7,2727.7 cw(c3299.89,2714.89) 3318,2714.89 cw(c3336.11,2714.89) v1@3323.3,2727.7
VGA_VSYNC: R31.2 U6.L13 | length 1506.6
  Top Layer w5: U6.L13@2656.43,1851.17 v1(2676.11,1870.85) ; U6.L13@2656.43,1857.52 ccw(c2656.43,1872.87) 2667.28,1862.02 ccw(c2678.13,1851.17) U6.L13@2662.78,1851.17 ; U6.L13@2658.78,1857.11 ccw(c2648.7,1874.57) v1@2668.68,1871.86 ; U6.L13@2662.37,1853.52 cw(c2679.83,1843.44) v1@2677.12,1863.42 ; 2665.66,1861.09 ccw(c2662.21,1867.07) v1@2668.87,1868.88 ; 2666.35,1860.4 cw(c2672.33,1856.95) v1@2674.14,1863.61 ; 2667.47,1862.35 cw(c2678.1,1856.21) v1@2676.45,1868.37 ; 2667.61,1862.21 ccw(c2661.47,1872.84) v1@2673.63,1871.19 ; v1@2668.61,1870.85 cw(c2650.5,1870.85) 2663.31,1858.05 cw(c2676.11,1845.24) v1@2676.11,1863.35 ; R31.2@3234.45,2768.45 cw(c3206.58,2740.58) v1@3246,2740.58 ; R31.2@3237.99,2771.99 cw(c3218.65,2752.65) 3246,2752.65 ; v1@3239.77,2737.18 ccw(c3221.64,2749.33) 3242.93,2754.15 ; v1@3240.7,2738.3 ccw(c3227.89,2751.11) 3246,2751.11 ccw(c3264.11,2751.11) v1@3251.3,2738.3 ; 3244.53,2747.09 ccw(c3256.61,2749.82) v1@3250,2739.34 ; v1(3246,2733) R31.2@3246,2776 ; 3246,2750.24 cw(c3271.76,2750.24) R31.2@3253.55,2768.45 ; v1@2668.87,1868.91 cw(c2662.04,1867.08) 2668.16,1863.55 ccw(c2662.04,1867.08) v1@2668.87,1868.91 ; v1@2674.17,1863.61 ccw(c2672.34,1856.78) 2668.81,1862.9 cw(c2672.34,1856.78) v1@2674.17,1863.61
  Mid-Layer 1 w5: v1(2676.11,1870.85) 2695,1889.74 2695,1915 2705,1925 2705,1968 3246,2509 v1(3246,2733) ; v1@2676.11,1878.35 ccw(c2676.11,1896.46) 2688.91,1883.65 ccw(c2701.72,1870.85) v1@2683.61,1870.85 ; v1@3240.7,2727.7 cw(c3227.89,2714.89) 3246,2714.89 cw(c3264.11,2714.89) v1@3251.3,2727.7
VGAD0: RN33.5 U6.P7 | length 2472.2
  Top Layer w5: U6.P7@2774.54,1608.59 cw(c2774.54,1593.24) 2785.39,1604.09 cw(c2796.24,1614.94) U6.P7@2780.89,1614.94 ; U6.P7@2774.54,1614.94 v1(2794.22,1595.26) ; U6.P7@2776.89,1609 cw(c2766.81,1591.54) v1@2786.79,1594.25 ; U6.P7@2780.48,1612.59 ccw(c2797.94,1622.67) v1@2795.23,1602.69 ; 2783.77,1605.02 cw(c2780.32,1599.04) v1@2786.98,1597.23 ; 2784.46,1605.71 ccw(c2790.44,1609.16) v1@2792.25,1602.5 ; 2785.58,1603.76 ccw(c2796.21,1609.9) v1@2794.56,1597.74 ; 2785.72,1603.9 cw(c2779.58,1593.27) v1@2791.74,1594.92 ; v1@2786.72,1595.26 ccw(c2768.61,1595.26) 2781.42,1608.06 ccw(c2794.22,1620.87) v1@2794.22,1602.76 ; v1@4486.21,2544.79 ccw(c4473.41,2557.59) 4491.51,2557.59 ccw(c4509.62,2557.59) v1@4496.82,2544.79 ; RN33.5@4487.71,2555.24 cw(c4478.54,2546.07) 4491.51,2546.07 cw(c4504.49,2546.07) RN33.5@4495.31,2555.24 ; v1@4488.89,2546.52 ccw(c4487.96,2549.01) 4490.54,2549.7 ccw(c4494.62,2550.8) v1@4493.5,2546.72 ; v1@4489.52,2546.72 ccw(c4488.4,2550.8) 4492.49,2549.7 ccw(c4495.06,2549.01) v1@4494.13,2546.52 ; v1(4491.51,2539.49) RN33.5@4491.51,2570.85 ; 2786.27,1602.56 cw(c2780.15,1599.03) 2786.98,1597.2 ccw(c2780.15,1599.03) 2786.27,1602.56 ; 2786.92,1603.21 ccw(c2790.45,1609.33) 2792.28,1602.5 cw(c2790.45,1609.33) 2786.92,1603.21
  Mid-Layer 1 w5: v1@2792.45,1593.49 ccw(c2805.71,1606.75) 2805.71,1588 ; v1(2794.22,1595.26) 2801.48,1588 3236,1588 4088,2440 4392.02,2440 v1(4491.51,2539.49) ; v1@2795.99,1597.03 ccw(c2817.78,1618.82) 2817.78,1588 ; v1@2799.52,1600.56 ccw(c2829.85,1630.89) 2829.85,1588 ; v1@4484.01,2539.49 cw(c4465.91,2539.49) 4478.71,2526.68 cw(c4491.51,2513.88) v1@4491.51,2531.99